# EAGLE board PCB_Gabri1.1.1 (EAGLE 8.6.3)
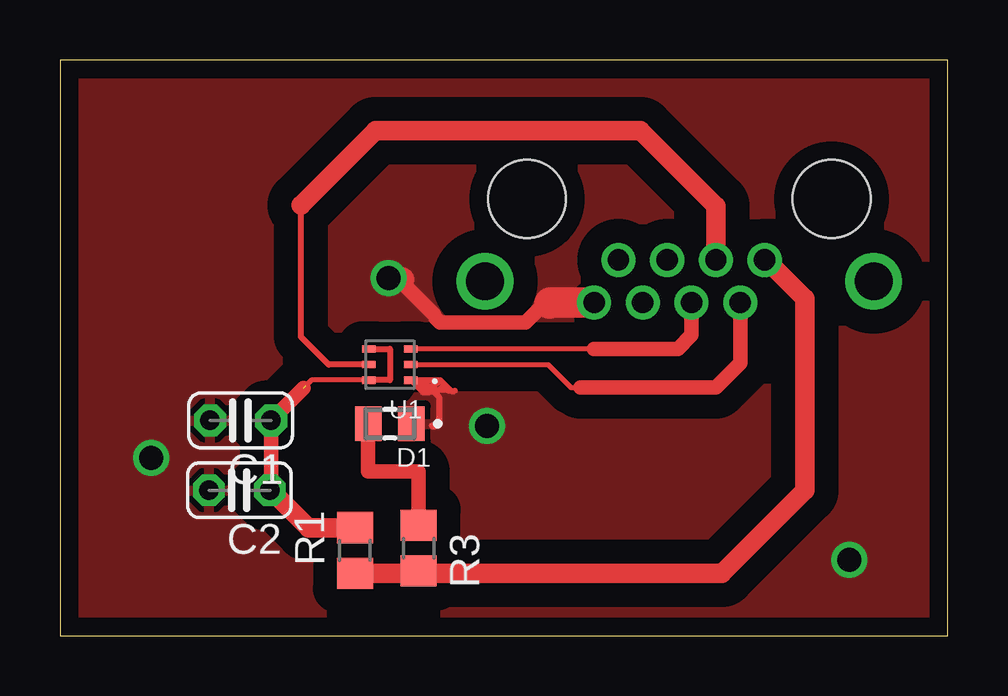
[diagram p0: board, top side]
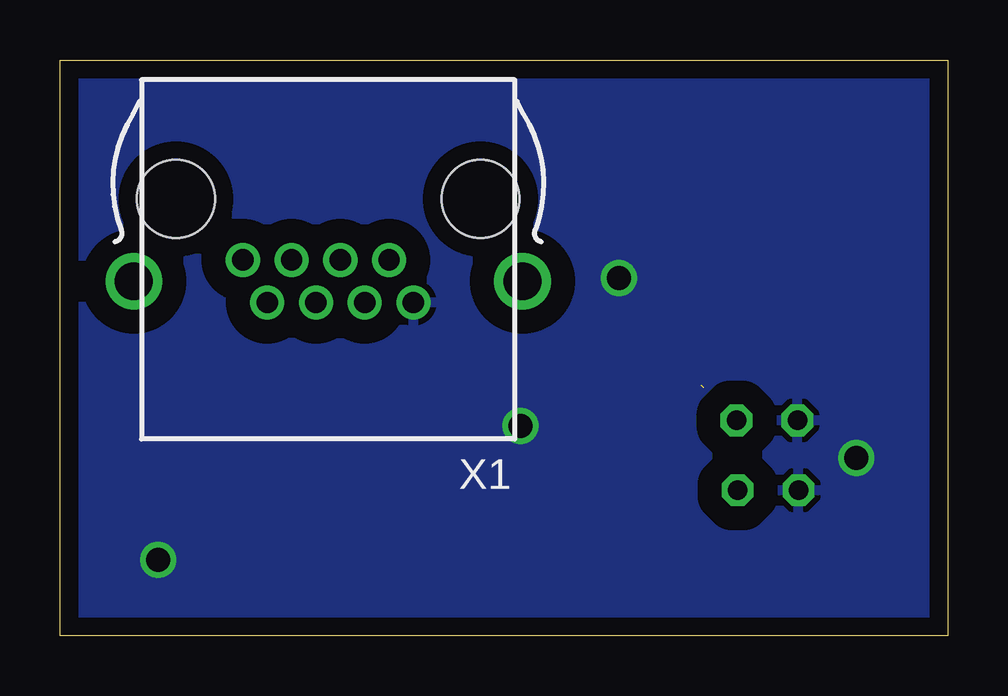
[diagram p1: board, bottom side, seen from below]

Size 37 x 24 mm. Coordinates in mm from the lower left corner, seen from the top.
Outline: 0,0 37,0 37,24 0,24 0,0
Copper layers (1*16): Top 0.035mm / dielectric 1.5mm / Bottom 0.035mm
Design rules "default *": minimum track width 10mil, minimum drill 0.5mm, track to track 1mm, track to pad 1mm, pad to pad 1mm, via to via 1mm, smd to smd 0.8mm, copper to edge 30mil, drill to drill 8mil, minimum pad ring 10mil, minimum via ring 8mil, stop-mask expansion 4mil, vias tented up to drill 0mil, thermal gap 10mil

## Footprints (pad centres in the part's own frame; a part is rotated, then mirrored left to right if it is on the bottom)
C025-024X044 = drill 0.813 octagon: 1 -1.27,0; 2 1.27,0
LEDC2012X70N = smd 1.1 x 1.45: A 0.9,0; C -0.9,0
R0805 = smd 1.3 x 1.5: 1 -0.95,0; 2 0.95,0
VISHAY_VEML6030_2X2X0.87 = smd 0.55 x 0.3: 1 -0.875,0.65; 2 -0.875,0; 3 -0.875,-0.65; 4 0.875,-0.65; 5 0.875,0; 6 0.875,0.65
0446200002 = drill 0.889 pad 1.422: 1 3.556,2.54; 2 2.54,4.318; 3 1.524,2.54; 4 0.508,4.318; 5 -0.508,2.54; 6 -1.524,4.318; 7 -2.54,2.54; 8 -3.556,4.318 | drill 1.575 pad 2.286: S@1 -8.103,3.429; S@2 8.103,3.429 | hole 3.251: 6.35,0; -6.35,0

## Placement (x,y rotation side)
C1  [C025-024X044]  7.53,8.97 180 top
C2  [C025-024X044]  7.48,6.06 180 top
D1  5988170107F  [LEDC2012X70N]  13.75,8.83 180 top
R1  [R0805]  12.3,3.55 90 top
R3  [R0805]  14.95,3.65 270 top
U1  VEML6030  [VISHAY_VEML6030_2X2X0.87]  13.75,11.3 180 top
X1  0446200002  [0446200002]  25.82,18.2 180 bottom

## Library data of the parts
C1 C2 R1 R3 = resistor
D1 = 5988170107F; AVAILABILITY: Unavailable; DESCRIPTION: LED GREEN CLEAR 0805 SMD; MF: Dialight; MP: 5988170107F; PACKAGE: 0805 Dialight; PRICE: None
U1 = VEML6030; AVAILABILITY: Unavailable; DESCRIPTION: VEML6030 Series 2 x 2 x 0.85 mm 50 mW I2C High Accuracy Ambient Light Sensor; MF: Vishay; MP: VEML6030; PACKAGE: SMD-6 Vishay; PRICE: None
X1 = 0446200002; AVAILABILITY: Unavailable; DESCRIPTION: Conn RJ-45 RCP 8 POS 2.04mm Solder RA Thru-Hole 8 Terminal 1 Port Tray Cat 3; MF: Molex, LLC; MP: 0446200002; PACKAGE: None; PRICE: None

## Nets
3V3: R1.1 R3.2 X1.1
GND: C1.2 C2.2 D1.C U1.1 X1.8
INT: U1.3 X1.4
LS_VDD: C1.1 C2.1 R1.2 U1.4 U1.6
N$1: D1.A R3.1
SCL: U1.5 X1.3
SDA: U1.2 X1.2

## Tracks (layer width: path | path; a pad name or v marks a point on that pad's centre or on a via)
3V3
  Top 0.254: X1.1 29.41,15.69
  Top 0.813: R1.1 14.95,2.6 | 14.95,2.6 R3.2 | 29.41,15.69 31.05,14.05 31.05,6.05 27.6,2.6 14.95,2.6
GND  (via drill 1)
  Top 0.254: U1.1 15.12,10.15 15.4,10.15 | 15.6,10.15 15.4,10.15 | U1.1 14.9,10.65 15.4,10.15 | U1.1 15.1,10.65 | 15.1,10.65 15.55,10.2 | 15.55,10.2 15.6,10.15 | 15.1,10.65 15.5,10.65 | 15.5,10.65 15.85,10.65 16.03,10.47 | 15.5,10.65 15.55,10.6 15.55,10.2 | 15.8,10.6 15.6,10.4 15.6,10.15 | 16.03,10.47 16.3,10.2 | 16.3,10.2 16.45,10.2 | 16.3,10.2 16.2,10.2 16.15,10.25 15.8,10.25 | 16.03,10.47 15.7,10.15 15.6,10.15 | 15.6,10.15 15.8,9.95 15.8,8.75 15.65,8.75 15.6,8.7 15.55,8.7 15.5,8.75 | 14.5,14.9 v13.7,14.9
  Top 0.61: v13.7,14.9 14.07,14.9 15.59,13.38 | 15.65,13.25 15.85,13.05 19.4,13.05 20.3,13.95 20.35,13.95
  Top 1.016: 13.65,14.85 14.25,14.85
  Top 1.27: X1.8 20.43,13.88 20.4,13.85
  other vias: 17.8,8.75 32.9,3.15 3.8,7.4
  pour Bottom: 0.25,23.8 0.25,0.25 36.85,0.25 36.85,23.8
  pour Top: 0.4,23.55 0.4,0.35 36.6,0.35 36.6,23.55
INT
  Top 0.203: 22.25,11.95 U1.3
  Top 0.61: X1.4 26.33,12.53 25.75,11.95 22.25,11.95
LS_VDD  (1 unrouted)
  Top 0.203: U1.6 10.48,10.65 10.27,10.44
  Top 0.254: U1.4 13.75,11.95 13.75,10.65 U1.6
  Top 0.61: C2.1 8.8,6.06 C1.1 10.15,10.32
  Top 0.813: R1.2 10.36,4.5 8.8,6.06
N$1
  Top 0.61: D1.A 12.85,6.85 14.95,6.85 R3.1
SCL
  Top 0.254: U1.5 11.2,11.3 10.05,12.45 10.05,17.95
  Top 0.813: X1.3 27.34,17.91 24.2,21.05 13.15,21.05 10.05,17.95
SDA
  Top 0.203: U1.2 20.35,11.3 21.31,10.34 21.7,10.34
  Top 0.61: X1.2 28.36,11.36 27.34,10.34 21.7,10.34